# EAGLE board ATCUxxxl3U_Synth (EAGLE 5.11)
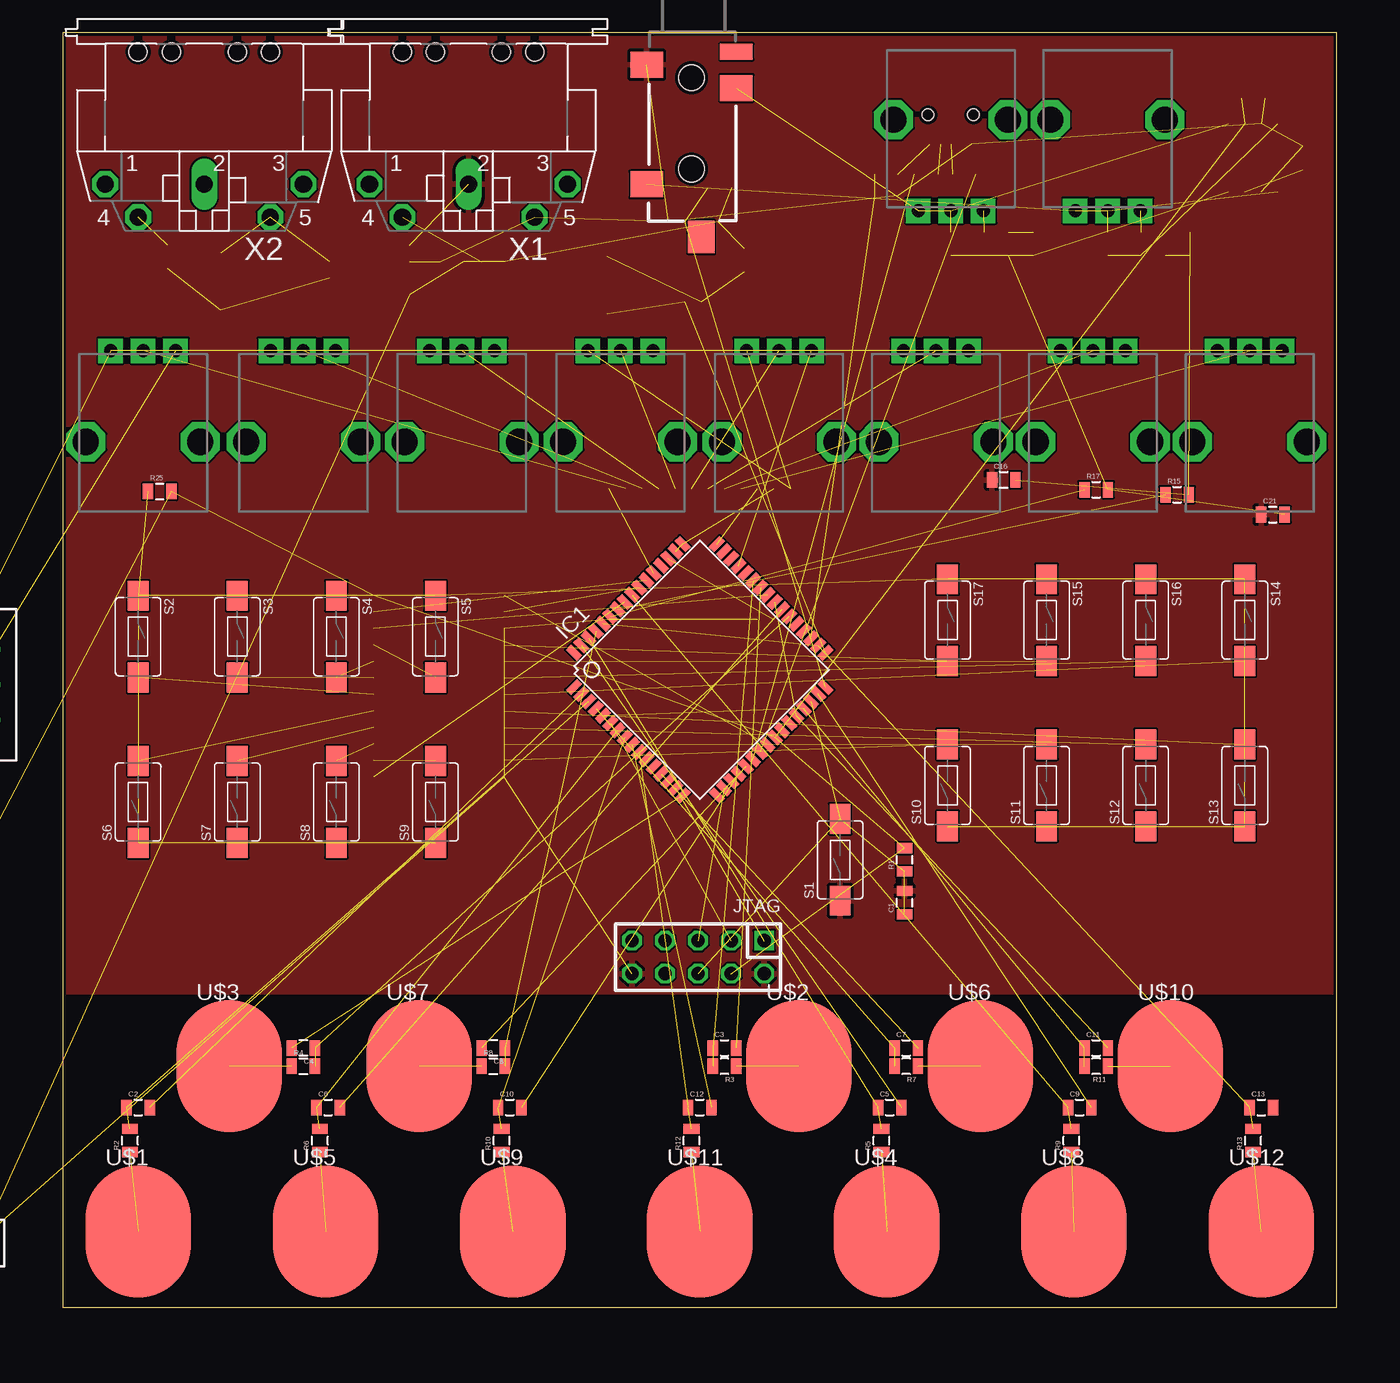
[diagram p0: board, top side]
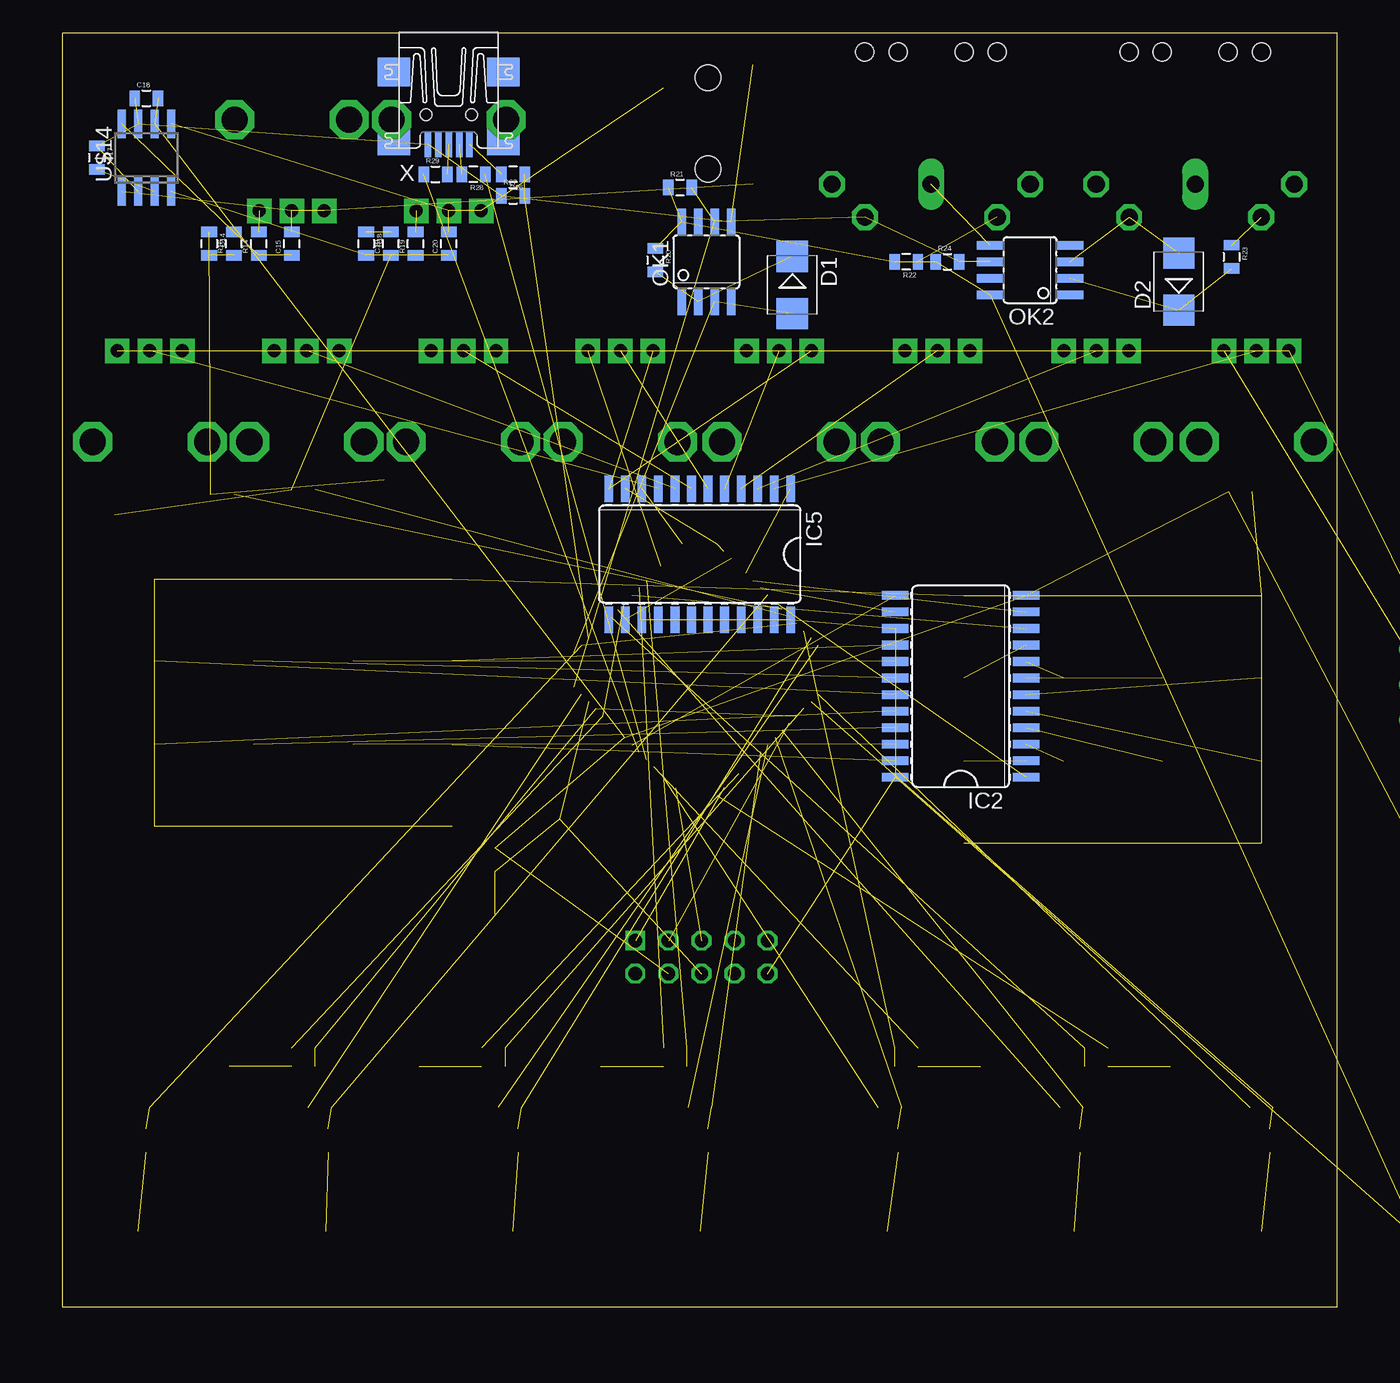
[diagram p1: board, bottom side, seen from below]

Size 98 x 98 mm. Coordinates in mm from the lower left corner, seen from the top.
Outline: 0,0 98,0 98,98 0,98 0,0
Copper layers (1*16): Top 0.035mm / dielectric 1.5mm / Bottom 0.035mm
Design rules "ITead_rule": minimum track width 6mil, minimum drill 12mil, track to track 6mil, track to pad 6mil, pad to pad 6mil, via to via 6mil, smd to smd 0mil, copper to edge 10mil, drill to drill 10mil, minimum pad ring 10mil, minimum via ring 6mil, stop-mask expansion 2mil, vias tented up to drill 100mil, thermal gap 10mil

## Footprints (pad centres in the part's own frame; a part is rotated, then mirrored left to right if it is on the bottom)
0805 = smd 0.8 x 1.2: 1 -0.9,0; 2 0.9,0
SMB = smd 2.4 x 2.4: A 2.2,0; C -2.2,0
TQFP64 = smd 1.194 x 0.559: 1 -7.76,5.905; 2 -7.76,5.118; 3 -7.76,4.331; 4 -7.76,3.543; 5 -7.76,2.756; 6 -7.76,1.968; 7 -7.76,1.181; 8 -7.76,0.394; 9 -7.76,-0.394; 10 -7.76,-1.181; 11 -7.76,-1.968; 12 -7.76,-2.756; 13 -7.76,-3.543; 14 -7.76,-4.331; 15 -7.76,-5.118; 16 -7.76,-5.905; 33 7.76,-5.905; 34 7.76,-5.118; 35 7.76,-4.331; 36 7.76,-3.543; 37 7.76,-2.756; 38 7.76,-1.968; 39 7.76,-1.181; 40 7.76,-0.394; 41 7.76,0.394; 42 7.76,1.181; 43 7.76,1.968; 44 7.76,2.756; 45 7.76,3.543; 46 7.76,4.331; 47 7.76,5.118; 48 7.76,5.905 | smd 0.559 x 1.194: 17 -5.905,-7.76; 18 -5.118,-7.76; 19 -4.331,-7.76; 20 -3.543,-7.76; 21 -2.756,-7.76; 22 -1.968,-7.76; 23 -1.181,-7.76; 24 -0.394,-7.76; 25 0.394,-7.76; 26 1.181,-7.76; 27 1.968,-7.76; 28 2.756,-7.76; 29 3.543,-7.76; 30 4.331,-7.76; 31 5.118,-7.76; 32 5.905,-7.76; 49 5.905,7.76; 50 5.118,7.76; 51 4.331,7.76; 52 3.543,7.76; 53 2.756,7.76; 54 1.968,7.76; 55 1.181,7.76; 56 0.394,7.76; 57 -0.394,7.76; 58 -1.181,7.76; 59 -1.968,7.76; 60 -2.756,7.76; 61 -3.543,7.76; 62 -4.331,7.76; 63 -5.118,7.76; 64 -5.905,7.76
SO24W = smd 0.66 x 2.032: 1 -6.985,-5.029; 2 -5.715,-5.029; 3 -4.445,-5.029; 4 -3.175,-5.029; 5 -1.905,-5.029; 6 -0.635,-5.029; 7 0.635,-5.029; 8 1.905,-5.029; 9 3.175,-5.029; 10 4.445,-5.029; 11 5.715,-5.029; 12 6.985,-5.029; 13 6.985,5.029; 14 5.715,5.029; 15 4.445,5.029; 16 3.175,5.029; 17 1.905,5.029; 18 0.635,5.029; 19 -0.635,5.029; 20 -1.905,5.029; 21 -3.175,5.029; 22 -4.445,5.029; 23 -5.715,5.029; 24 -6.985,5.029
V-REG-3_SOT223 = smd 1.219 x 2.235: 1 -2.311,-3.099; 2 0,-3.099; 3 2.311,-3.099 | smd 3.6 x 2.2: 4 0,3.099
AVR-JTAG-10 = drill 1.016 square: 1 -5.08,-1.27 | drill 1.016 octagon: 2 -5.08,1.27; 3 -2.54,-1.27; 4 -2.54,1.27; 5 0,-1.27; 6 0,1.27; 7 2.54,-1.27; 8 2.54,1.27; 9 5.08,-1.27; 10 5.08,1.27
SOIC08 = smd 0.66 x 2.032: 1 -1.905,-3.073; 2 -0.635,-3.073; 3 0.635,-3.073; 4 1.905,-3.073; 5 1.905,3.073; 6 0.635,3.073; 7 -0.635,3.073; 8 -1.905,3.073
TACTILE-SWITCH-1101NE = smd 2.3 x 1.6: P$1 -3.15,0; P$2 3.15,0
SWITCH-SPDT_KIT = drill 1.016 pad 1.88 round: 1 0,2.718; 2 0,0; 3 0,-2.718
AUDIO-JACK-3.5MM-SMD = smd 2 x 2.5: RING 4.3,3.45; SLEEVE 2.5,-3.45; TIP 11.7,-3.45 | smd 1.2 x 2.5: RSH 1.5,3.45 | smd 2.5 x 2: TSH 15.75,0.75 | hole 2: 3.5,0; 10.5,0
KEY_PAD = smd 8.128 x 10.16: 1 0,0
ALPS_POT = drill 1 pad 1.88 square: P$1 7,-2.5; P$2 7,0; P$3 7,2.5 | drill 2 octagon: P$4 0,-4.4; P$5 0,4.4
SO-08@1 = smd 0.6 x 2.2: 1 -1.905,-2.6; 2 -0.635,-2.6; 3 0.635,-2.6; 4 1.905,-2.6; 5 1.905,2.6; 6 0.635,2.6; 7 -0.635,2.6; 8 -1.905,2.6
SOT89-3L = smd 0.7 x 1.1: 1 -1.5,-1.75; 3 1.5,-1.75 | smd 0.7 x 1.8: 2 0,-1.4 | smd 2 x 2.8: 4 0,0.9
UX60-MB-5ST = smd 2 x 0.5: 1 2.25,1.6; 2 2.25,0.8; 3 2.25,0; 4 2.25,-0.8; 5 2.25,-1.6 | smd 2.2 x 2.5: M1 -3.3,-4.2; M2 -3.3,4.2; M3 2,4.2; M4 2,-4.2 | hole 0.9: 0,-1.75; 0,1.75
MAB5SH = drill 1.321 octagon: 1 7.62,7.62; 3 -7.62,7.62; 4 5.08,10.16; 5 -5.08,10.16 | drill 1.321 long: 2 0,7.62 | hole 1.4: 2.54,-2.54; -2.54,-2.54; -5.08,-2.54; 5.08,-2.54

## Placement (x,y rotation side)
C1  .1uf  [0805]  64.75,31.09 90 top
C2  22nf  [0805]  5.82,15.34 0 top
C3  22nf  [0805]  50.91,19.92 0 top
C4  22nf  [0805]  18.52,19.92 180 top
C5  22nf  [0805]  63.61,15.34 0 top
C6  22nf  [0805]  20.43,15.34 0 top
C7  22nf  [0805]  64.88,19.92 0 top
C8  22nf  [0805]  33.12,19.92 180 top
C9  22nf  [0805]  78.21,15.34 0 top
C10  22nf  [0805]  34.39,15.34 0 top
C11  22nf  [0805]  79.48,19.92 0 top
C12  22nf  [0805]  49,15.34 0 top
C13  22nf  [0805]  92.18,15.34 0 top
C14  [0805]  86.72,81.77 270 bottom
C15  [0805]  80.37,81.77 90 bottom
C16  [0805]  72.37,63.61 0 top
C17  [0805]  95.35,88.37 270 bottom
C18  [0805]  91.55,92.94 0 bottom
C19  [0805]  72.75,81.77 90 bottom
C20  [0805]  68.3,81.77 90 bottom
C21  [0805]  93.07,60.94 0 top
D1  1N4148  [SMB]  41.89,78.59 270 bottom
D2  1N4148  [SMB]  12.17,78.84 90 bottom
IC1  ATCXXXL3U  [TQFP64]  49,49 45 top
IC2  4067D  [SO24W]  28.93,47.73 90 bottom
IC3  [V-REG-3_SOT223]  -7.77,4.93 0 top  (outside the outline)
IC4  [V-REG-3_SOT223]  -15.26,4.93 0 top  (outside the outline)
IC5  4067D  [SO24W]  49,57.89 180 bottom
JTAG  AVR-JTAG-10  [AVR-JTAG-10]  48.87,26.9 180 top
OK1  HCPL0600  [SOIC08]  48.49,80.37 0 bottom
OK2  HCPL0600  [SOIC08]  23.6,79.73 90 bottom
R1  10k  [0805]  64.75,34.39 90 top
R2  4.7k  [0805]  5.19,12.8 90 top
R3  4.7k  [0805]  50.91,18.52 180 top
R4  4.7k  [0805]  18.52,18.52 0 top
R5  4.7k  [0805]  62.97,12.8 90 top
R6  4.7k  [0805]  19.79,12.8 90 top
R7  4.7k  [0805]  64.88,18.52 180 top
R8  4.7k  [0805]  33.12,18.52 0 top
R9  4.7k  [0805]  77.58,12.8 90 top
R10  4.7k  [0805]  33.76,12.8 90 top
R11  4.7k  [0805]  79.48,18.52 180 top
R12  4.7k  [0805]  48.37,12.8 90 top
R13  4.7k  [0805]  91.55,12.8 90 top
R14  [0805]  82.91,81.77 90 bottom
R15  [0805]  85.7,62.46 0 top
R16  [0805]  84.81,81.77 90 bottom
R17  [0805]  79.48,62.84 0 top
R18  [0805]  74.65,81.77 270 bottom
R19  [0805]  70.84,81.77 90 bottom
R20  220  [0805]  52.43,80.5 270 bottom
R21  10k  [0805]  50.52,86.08 0 bottom
R22  220  [0805]  33.12,80.37 180 bottom
R23  220  [0805]  8.11,80.75 270 bottom
R24  10k  [0805]  29.95,80.37 0 bottom
R25  [0805]  7.47,62.72 0 top
R26  1k  [0805]  63.35,87.1 180 bottom
R27  1.5k  [0805]  63.35,85.45 0 bottom
R28  36R  [0805]  66.4,87.1 180 bottom
R29  36R  [0805]  69.32,87.1 0 bottom
S1  SWITCH-MOMENTARY-2-SMD-1101NE  [TACTILE-SWITCH-1101NE]  59.8,34.39 90 top
S2  modwheel  [TACTILE-SWITCH-1101NE]  5.82,51.54 270 top
S3  modwheel  [TACTILE-SWITCH-1101NE]  13.44,51.54 270 top
S4  osc b on/off  [TACTILE-SWITCH-1101NE]  21.06,51.54 270 top
S5  wave A saw/squ  [TACTILE-SWITCH-1101NE]  28.68,51.54 270 top
S6  wave B square/saw  [TACTILE-SWITCH-1101NE]  5.82,38.84 90 top
S7  octave B down  [TACTILE-SWITCH-1101NE]  13.44,38.84 90 top
S8  OSCA noise toggle  [TACTILE-SWITCH-1101NE]  21.06,38.84 90 top
S9  OSCA noise toggle  [TACTILE-SWITCH-1101NE]  28.68,38.84 90 top
S10  DCF KBD TRACK off/on  [TACTILE-SWITCH-1101NE]  68.05,40.11 90 top
S11  DCF HP/LP  [TACTILE-SWITCH-1101NE]  75.67,40.11 90 top
S12  LFO Mod DCO/DCF  [TACTILE-SWITCH-1101NE]  83.29,40.11 90 top
S13  LFO Mod DCO/DCF  [TACTILE-SWITCH-1101NE]  90.91,40.11 90 top
S14  DCF KBD TRACK off/on  [TACTILE-SWITCH-1101NE]  90.91,52.81 270 top
S15  LFO Mod DCO/DCF  [TACTILE-SWITCH-1101NE]  75.67,52.81 270 top
S16  DCF HP/LP  [TACTILE-SWITCH-1101NE]  83.29,52.81 270 top
S17  LFO Mod DCO/DCF  [TACTILE-SWITCH-1101NE]  68.05,52.81 270 top
S18  [SWITCH-SPDT_KIT]  -5.74,47.86 0 top  (outside the outline)
U1  [AUDIO-JACK-3.5MM-SMD]  48.37,98.02 270 top
U$1  KEY_PAD  [KEY_PAD]  5.82,5.82 0 top
U$2  KEY_PAD  [KEY_PAD]  56.62,18.52 0 top
U$3  KEY_PAD  [KEY_PAD]  12.8,18.52 0 top
U$4  KEY_PAD  [KEY_PAD]  63.38,5.82 0 top
U$5  KEY_PAD  [KEY_PAD]  20.22,5.82 0 top
U$6  KEY_PAD  [KEY_PAD]  70.59,18.52 0 top
U$7  KEY_PAD  [KEY_PAD]  27.41,18.52 0 top
U$8  KEY_PAD  [KEY_PAD]  77.78,5.82 0 top
U$9  KEY_PAD  [KEY_PAD]  34.62,5.82 0 top
U$10  KEY_PAD  [KEY_PAD]  85.19,18.52 0 top
U$11  KEY_PAD  [KEY_PAD]  49,5.82 0 top
U$12  KEY_PAD  [KEY_PAD]  92.18,5.82 0 top
U$13  [ALPS_POT]  80.37,91.29 270 top
U$14  TPA302  [SO-08@1]  91.55,88.37 0 bottom
U$15  [ALPS_POT]  68.3,91.29 270 top
U$16  [ALPS_POT]  91.29,66.53 90 top
U$17  [ALPS_POT]  67.16,66.53 90 top
U$18  [ALPS_POT]  79.23,66.53 90 top
U$19  [ALPS_POT]  55.1,66.53 90 top
U$20  [ALPS_POT]  42.9,66.53 90 top
U$21  [ALPS_POT]  18.52,66.53 90 top
U$22  [ALPS_POT]  30.71,66.53 90 top
U$23  [ALPS_POT]  6.2,66.53 90 top
U$24  AP1115  [SOT89-3L]  -24.66,4.42 0 top  (outside the outline)
U$25  AP1115  [SOT89-3L]  -33.3,3.91 0 top  (outside the outline)
X  MINI-USB-UX60-MB-5ST  [UX60-MB-5ST]  68.3,91.67 270 bottom
X1  MIDI  [MAB5SH]  31.22,93.96 180 top
X2  MIDI  [MAB5SH]  10.9,93.96 180 top

## Library data of the parts
C1-C21 R1-R29 S18 U1 U$13 U$15-U$23 = SparkFun
D1 D2 = diode
IC1 JTAG = atmel-avr32-michel
IC2 IC5 = 40xx
IC3 IC4 U$24 U$25 = PWM_ATUC64L4U
OK1 OK2 = optocoupler; MF: AGILENT TECHNOLOGIES; MPN: HCPL-0600-000E; OC_FARNELL: 9994696; OC_NEWARK: 88H7774
S1 = table_tiles_tlc
S2-S17 = SparkFun; OC_NEWARK: unknown
U$1-U$12 U$14 = ATCUxxxl3U_Synth
X = con-hirose; OC_FARNELL: unknown; OC_NEWARK: unknown
X1 X2 = og-midi

## Nets
5V: IC3.2 OK1.8 OK2.8 R20.1 R21.1 R22.2 R24.1
5VAMP: IC4.2
A: IC1.41 IC2.10
A1: IC1.48 IC5.10
B: IC1.54 IC2.11
B1: IC1.49 IC1.50 IC5.11
C: IC1.55 IC2.14
C1: IC1.51 IC5.14
CSA0: C13.1 IC1.34 IC1.60 R13.2
CSA3: C8.1 IC1.61 R8.2
CSA4: C2.1 IC1.3 R2.2
CSA5: C5.1 IC1.62 R5.2
CSA7: C4.1 IC1.38 R4.2
CSA9: C10.1 IC1.8 R10.2
CSA10: C7.1 IC1.4 R7.2
CSA11: C12.1 IC1.10 R12.2
CSA13: C3.1 IC1.43 R3.2
CSA14: C11.1 IC1.5 IC1.29 R11.2
CSA15: C6.1 IC1.7 R6.2
CSA16: C9.1 IC1.56 R9.2
CSB0: C13.2
CSB3: C8.2 IC1.21
CSB4: C2.2 IC1.2
CSB5: C5.2 IC1.63
CSB7: C4.2 IC1.16
CSB9: C10.2 IC1.20
CSB10: C7.2 IC1.13
CSB11: C12.2 IC1.9
CSB13: C3.2 IC1.42
CSB14: C11.2 IC1.28 IC1.40
CSB15: C6.2 IC1.39
CSB16: C9.2 IC1.31
D: IC1.24 IC2.13
D1: IC5.13
D+: IC1.23 R29.1
D-: IC1.22 R28.1
DAC0: IC1.58 R15.1
DAC1: IC1.59 R17.1
GND: C1.2 C16.1 C17.1 C18.1 C21.1 IC2.15 IC2.24 IC3.1 IC4.1 IC5.15 IC5.24 JTAG.2 JTAG.10 OK1.5 OK2.5 R27.1 S1.P$1 U1.SLEEVE U$14.2 U$14.7 U$24.1 X1.2 X.5
GNDANA: IC1.45 U$16.P$1 U$17.P$1 U$18.P$1 U$19.P$1 U$20.P$1 U$21.P$1 U$22.P$1 U$23.P$1 U$25.1
N$1: R2.1 U$1.1
N$2: R4.1 U$3.1
N$3: R6.1 U$5.1
N$4: R8.1 U$7.1
N$5: R10.1 U$9.1
N$6: R12.1 U$11.1
N$7: R3.1 U$2.1
N$8: R5.1 U$4.1
N$9: R7.1 U$6.1
N$10: R9.1 U$8.1
N$11: R11.1 U$10.1
N$12: R13.1 U$12.1
N$13: C14.2 R16.1
N$14: C15.1 R14.1 R16.2 U$14.8
N$15: C19.2 R18.1
N$16: C20.1 R18.2 R19.1 U$14.4
N$17: R14.2 U$13.P$3
N$18: R19.2 U$15.P$3
N$19: C17.2 U$14.3
N$23: R28.2 X.2
N$27: R29.2 X.3
N$28: D2.C OK2.2 R23.2
N$31: IC5.23
N$32: IC5.22
N$33: IC5.21
N$34: IC5.20
N$35: IC5.19
N$36: IC5.18
N$37: C14.1 C16.2 R15.2
N$38: C19.1 C21.2 R17.2
N$39: IC5.17
N$40: D1.C OK1.2 R20.2
N$41: R25.1 S2.P$1 S3.P$1 S4.P$1 S5.P$1 S6.P$1 S7.P$1 S8.P$1 S9.P$1 S10.P$1 S11.P$1 S12.P$1 S13.P$1 S14.P$1 S15.P$1 S16.P$1 S17.P$1
N$42: IC5.16
N$43: IC2.9 S5.P$2
N$44: IC2.8 S4.P$2
N$45: U$24.2 U$25.4
N$46: IC2.7 S3.P$2
N$47: IC2.6 S2.P$2
N$48: IC2.5 S6.P$2
N$49: IC2.4 S7.P$2
N$50: IC2.3 S8.P$2
N$51: IC2.2 S9.P$2
N$52: IC2.23 S10.P$2
N$53: IC2.22 S11.P$2
N$54: IC2.21 S12.P$2
N$55: IC2.20 S13.P$2
N$56: IC2.19 S14.P$2
N$57: IC2.18 S16.P$2
N$58: IC2.17 S15.P$2
N$59: IC2.16 S17.P$2
N$68: R22.1 X1.4
N$72: R23.1 X2.4
N$73: D2.A OK2.3 X2.5
PA02: IC1.17
POT1: IC5.9 U$16.P$2
POT2: IC5.8 U$18.P$2
POT3: IC5.7 U$17.P$2
POT4: IC5.6 U$19.P$2
POT5: IC5.5 U$20.P$2
POT6: IC5.4 U$22.P$2
POT7: IC5.3 U$21.P$2
POT8: IC5.2 U$23.P$2
RESETN: C1.1 IC1.30 JTAG.6 R1.1 S1.P$2
RXD: IC1.32 OK1.6 OK2.6 R21.2 R24.2 X1.5
TCK: IC1.15 JTAG.1
TDI: JTAG.9
TDO: IC1.6 JTAG.3
TMS: IC1.18 JTAG.5
TXD: D1.A IC1.33 OK1.3
USB_5V: R26.2 X.1
VBUS: IC1.35 R26.1 R27.2
VCC: C18.2 IC1.25 IC2.12 JTAG.4 R1.2 R25.2 U$14.6 U$24.3
VCCANA: IC5.12 U$16.P$3 U$17.P$3 U$18.P$3 U$19.P$3 U$20.P$3 U$21.P$3 U$22.P$3 U$23.P$3 U$25.3
VIN: IC3.3 IC4.3 U$24.4 U$25.2
VO1: C15.2 U1.TIP U$13.P$1 U$13.P$2 U$14.1
VO2: C20.2 U1.RING U$14.5 U$15.P$1 U$15.P$2
X: IC1.57 IC2.1
X1: IC1.53 IC5.1

## Tracks (layer width: path | path; a pad name or v marks a point on that pad's centre or on a via)
5V  (6 unrouted)
A  (1 unrouted)
A1  (1 unrouted)
B  (1 unrouted)
B1  (2 unrouted)
C  (1 unrouted)
C1  (1 unrouted)
CSA0  (3 unrouted)
CSA3  (2 unrouted)
CSA4  (2 unrouted)
CSA5  (2 unrouted)
CSA7  (2 unrouted)
CSA9  (2 unrouted)
CSA10  (2 unrouted)
CSA11  (2 unrouted)
CSA13  (2 unrouted)
CSA14  (3 unrouted)
CSA15  (2 unrouted)
CSA16  (2 unrouted)
CSB3  (1 unrouted)
CSB4  (1 unrouted)
CSB5  (1 unrouted)
CSB7  (1 unrouted)
CSB9  (1 unrouted)
CSB10  (1 unrouted)
CSB11  (1 unrouted)
CSB13  (1 unrouted)
CSB14  (2 unrouted)
CSB15  (1 unrouted)
CSB16  (1 unrouted)
D  (1 unrouted)
D+  (1 unrouted)
D-  (1 unrouted)
DAC0  (1 unrouted)
DAC1  (1 unrouted)
GND  (15 unrouted)
  pour Top: -2.56,100.69 98.53,100.69 99.42,24.23 -1.67,24.23
GNDANA  (9 unrouted)
N$1  (1 unrouted)
N$2  (1 unrouted)
N$3  (1 unrouted)
N$4  (1 unrouted)
N$5  (1 unrouted)
N$6  (1 unrouted)
N$7  (1 unrouted)
N$8  (1 unrouted)
N$9  (1 unrouted)
N$10  (1 unrouted)
N$11  (1 unrouted)
N$12  (1 unrouted)
N$13  (1 unrouted)
N$14  (3 unrouted)
N$15  (1 unrouted)
N$16  (3 unrouted)
N$17  (1 unrouted)
N$18  (1 unrouted)
N$19  (1 unrouted)
N$23  (1 unrouted)
N$27  (1 unrouted)
N$28  (2 unrouted)
N$37  (2 unrouted)
N$38  (2 unrouted)
N$40  (2 unrouted)
N$41  (16 unrouted)
N$43  (1 unrouted)
N$44  (1 unrouted)
N$45  (1 unrouted)
N$46  (1 unrouted)
N$47  (1 unrouted)
N$48  (1 unrouted)
N$49  (1 unrouted)
N$50  (1 unrouted)
N$51  (1 unrouted)
N$52  (1 unrouted)
N$53  (1 unrouted)
N$54  (1 unrouted)
N$55  (1 unrouted)
N$56  (1 unrouted)
N$57  (1 unrouted)
N$58  (1 unrouted)
N$59  (1 unrouted)
N$68  (1 unrouted)
N$72  (1 unrouted)
N$73  (2 unrouted)
POT1  (1 unrouted)
POT2  (1 unrouted)
POT3  (1 unrouted)
POT4  (1 unrouted)
POT5  (1 unrouted)
POT6  (1 unrouted)
POT7  (1 unrouted)
POT8  (1 unrouted)
RESETN  (4 unrouted)
RXD  (5 unrouted)
TCK  (1 unrouted)
TDO  (1 unrouted)
TMS  (1 unrouted)
TXD  (2 unrouted)
USB_5V  (1 unrouted)
VBUS  (2 unrouted)
VCC  (7 unrouted)
VCCANA  (9 unrouted)
VIN  (3 unrouted)
VO1  (4 unrouted)
VO2  (4 unrouted)
X  (1 unrouted)
X1  (1 unrouted)